# Allegro board artificiall_eye_ver00_routed.brd
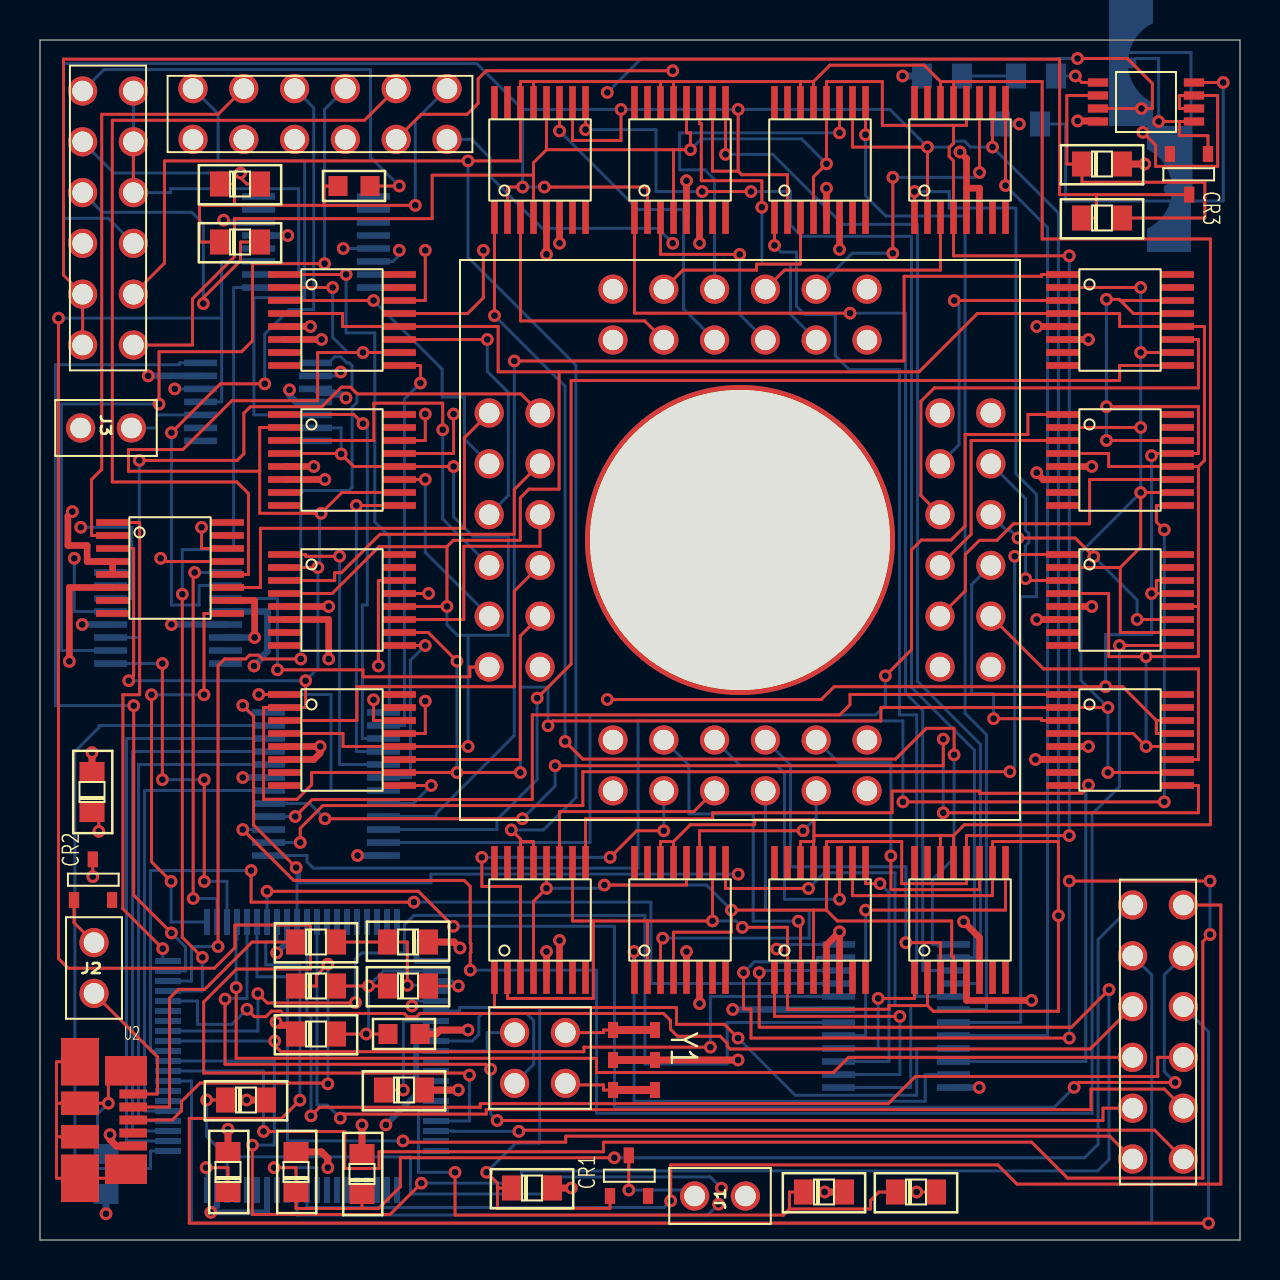
[diagram p0: board, top side]
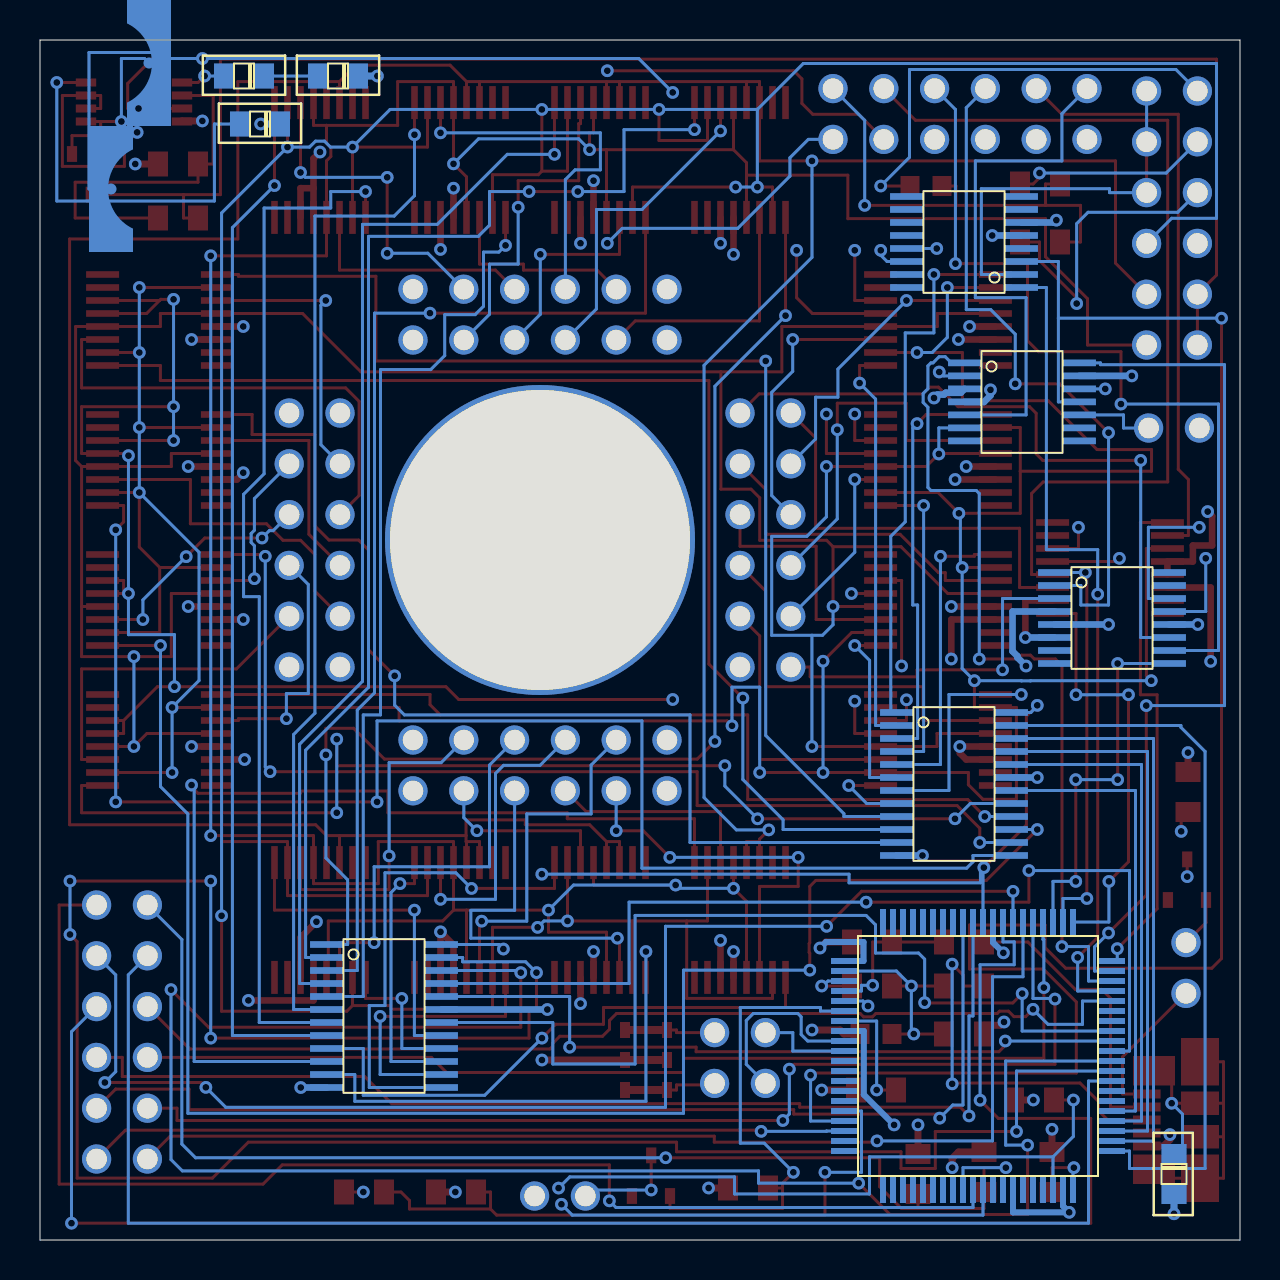
[diagram p1: board, bottom side, seen from below]

Outline 60 x 60 mm; copper layers: TOP, POWER, GROUND, BOTTOM. Coordinates in mm from the lower left corner of the outline.
Outline path: 0,60 60,60 60,0 0,0 0,60

## Design rules (mm)
constraint set DEFAULT: min track width 0.15
nets with their own width: min track width 0.35; nets GND

## Placement (name value [footprint] x y rotation side)
C1  220nF  [RC0805_SMK]  24.6 2.6 0 top
C2  4.7uF  [RC0805_SMK]  2.6 22.4 90 top
C3  10pF  [RC0805_SMK]  18.4 14.9 180 top
C4  10pF  [RC0805_SMK]  13.8 10.3 0 top
C5  470nF  [RC0805_SMK]  9.4 3.4 90 top
C6  10uF  [RC0805_SMK]  10.3 7 0 top
C7  2.2nF  [RC0805_SMK]  39.2 2.4 0 top
C8  33nF  [RC0805_SMK]  49 55.8 0 bottom
C9  150pF  [RC0805_SMK]  45.1 58.2 0 bottom
C10  220nF  [RC0805_SMK]  18.2 7.5 0 top
C11  10uF  [RC0805_SMK]  16.1 3.3 90 top
C12  100nF  [RC0805_SMK]  12.8 3.4 90 top
CR1  ZHCS500  [SOT23_LONGERPADS]  28.5 2.2 90 top
CR2  ZHCS500  [SOT23_LONGERPADS]  1.7 17 90 top
CR3  ZHCS500  [SOT23_LONGERPADS]  58.4 54.3 270 top
J1  header 1x2  [HEADER1X2]  34 2.2 90 top
J2  header 1x2  [HEADER1X2]  2.7 13.6 0 top
J3  header 1x2  [HEADER1X2]  3.3 40.6 270 top
L1  9uH  [FERRITE_BEAD]  55.5 55.7 90 bottom
R1  27  [RC0805_SMK]  13.8 14.9 0 top
R2  27  [RC0805_SMK]  13.8 12.7 0 top
R3  1M  [0603_SHN]  18.2 10.3 0 top
R4  1.4K  [RC0805_SMK]  18.4 12.7 0 top
R5  33K  [RC0805_SMK]  3.3 3.3 270 bottom
R6  47K  [RC0805_SMK]  43.8 2.4 0 top
R7  1M  [0603_SHN]  15.7 52.7 0 top
R8  10K  [RC0805_SMK]  10 52.8 0 top
R9  1.0K  [RC0805_SMK]  10 49.9 0 top
R10  38.3K  [RC0805_SMK]  53.1 51.1 0 top
R11  10K  [RC0805_SMK]  53.1 53.8 0 top
R12  34K  [RC0805_SMK]  49.8 58.2 0 bottom
U1  MSP430F5529  [MSP430F5529_LQFP80]  13.1 9.2 90 bottom
U2  micro_USB  [MICRO_USB]  2 6 0 top
U3  header_2x2  [HEADER_2X2]  25 9.1 180 top
U4  header2x6  [HEADER2X6]  14 56.3 90 top
U5  ADP1612_3  [MSOP8]  55.3 56.9 0 top
U6  header2x6  [HEADER2X6]  3.4 51.1 0 top
U7  74HC154PW  [TSSOP24]  42.8 12.5 180 bottom
U8  ADG1636  [TSSOP16]  6.5 33.6 0 top
U9  ADG1604  [TSSOP14]  10.9 41.9 180 bottom
U10  ADG1636  [TSSOP16]  13.8 49.9 0 bottom
U11  ADG1636  [TSSOP16]  6.4 31.1 180 bottom
U12  ADG1636  [TSSOP16]  25 54 90 top
U13  ADG1636  [TSSOP16]  32 54 90 top
U14  ADG1636  [TSSOP16]  39 54 90 top
U15  ADG1636  [TSSOP16]  46 54 90 top
U16  ADG1636  [TSSOP16]  15.1 46 0 top
U17  ADG1636  [TSSOP16]  54 46 0 top
U18  74HC154PW  [TSSOP24]  14.3 24.1 180 bottom
U19  ADG1636  [TSSOP16]  15.1 39 0 top
U21  ADG1636  [TSSOP16]  54 39 0 top
U22  ADG1636  [TSSOP16]  15.1 32 0 top
U23  ADG1636  [TSSOP16]  54 32 0 top
U24  ADG1636  [TSSOP16]  15.1 25 0 top
U25  ADG1636  [TSSOP16]  54 25 0 top
U26  ADG1636  [TSSOP16]  25 16 90 top
U27  ADG1636  [TSSOP16]  32 16 90 top
U28  ADG1636  [TSSOP16]  39 16 90 top
U29  ADG1636  [TSSOP16]  46 16 90 top
U30  header2x6  [HEADER2X6]  55.9 10.4 0 top
U31  Optic_nerve  [OPTICNERVE]  35 35 0 top
Y1  CST5.00MGW  [MURATA_OSC]  29.7 9 270 top

## Library data of the parts
C1 C3-C5 C7-C10 C12 = CAP NP
C2 C6 C11 = CAP
CR1-CR3 = DIODE_SCHOTTKY31
J1-J3 = header 1x2
L1 = INDUCTOR
R1-R12 = R
U1 = MSP430F5529
U2 = micro_USB
U3 = header_2x2
U4 U6 U30 = header2x6
U5 = ADP1612_3
U7 U18 = 74HC154PW
U8 U10-U17 U19 U21-U29 = ADG1636
U9 = ADG1604
U31 = Optic_nerve
Y1 = OSC6_SM

## Footprints (pads in the part's own frame, mm; a bottom-side part is the same pattern mirrored in y, then rotated)
0603_SHN
  rect 0.95x1 smd: 1(-0.8,0) 2(0.8,0)
FERRITE_BEAD
  custom 6.3x2.2 smd: 1(-3.15,0.95) 2(3.15,-0.95)
HEADER1X2
  round 1.46 hole 1.029: 1(0,1.27) 2(0,-1.27)
HEADER2X6
  round 1.46 hole 1.029: 1(-1.27,6.35) 2(-1.27,3.81) 3(-1.27,1.27) 4(-1.27,-1.27) 5(-1.27,-3.81) 6(-1.27,-6.35) 7(1.27,6.35) 8(1.27,3.81) 9(1.27,1.27) 10(1.27,-1.27) 11(1.27,-3.81) 12(1.27,-6.35)
HEADER_2X2
  round 1.46 hole 1.029: 1(-1.27,1.27) 2(-1.27,-1.27) 3(1.27,1.27) 4(1.27,-1.27)
MICRO_USB
  rect 1.38x0.45 smd: 1(2.66,1.3) 2(2.66,0.65) 3(2.66,0) 4(2.66,-0.65) 5(2.66,-1.3)
  rect 2.1x1.475 smd: 6(2.3,2.462) 7(2.3,-2.462)
  rect 1.9x2.375 smd: 8(0,2.913) 9(0,-2.913)
  rect 1.9x1.175 smd: 10(0,0.838) 11(0,-0.838)
MSOP8
  rect 1.016x0.406 smd: 1(-2.4,0.975) 2(-2.4,0.325) 3(-2.4,-0.325) 4(-2.4,-0.975) 5(2.4,-0.975) 6(2.4,-0.325) 7(2.4,0.325) 8(2.4,0.975)
MSP430F5529_LQFP80
  rect 1.3x0.3 smd: 1(-6.7,4.75) 2(-6.7,4.25) 3(-6.7,3.75) 4(-6.7,3.25) 5(-6.7,2.75) 6(-6.7,2.25) 7(-6.7,1.75) 8(-6.7,1.25) 9(-6.7,0.75) 10(-6.7,0.25) 11(-6.7,-0.25) 12(-6.7,-0.75) 13(-6.7,-1.25) 14(-6.7,-1.75) 15(-6.7,-2.25) 16(-6.7,-2.75) 17(-6.7,-3.25) 18(-6.7,-3.75) 19(-6.7,-4.25) 20(-6.7,-4.75) 41(6.7,-4.75) 42(6.7,-4.25) 43(6.7,-3.75) 44(6.7,-3.25) 45(6.7,-2.75) 46(6.7,-2.25) 47(6.7,-1.75) 48(6.7,-1.25) 49(6.7,-0.75) 50(6.7,-0.25) 51(6.7,0.25) 52(6.7,0.75) 53(6.7,1.25) 54(6.7,1.75) 55(6.7,2.25) 56(6.7,2.75) 57(6.7,3.25) 58(6.7,3.75) 59(6.7,4.25) 60(6.7,4.75)
  rect 0.3x1.3 smd: 21(-4.75,-6.7) 22(-4.25,-6.7) 23(-3.75,-6.7) 24(-3.25,-6.7) 25(-2.75,-6.7) 26(-2.25,-6.7) 27(-1.75,-6.7) 28(-1.25,-6.7) 29(-0.75,-6.7) 30(-0.25,-6.7) 31(0.25,-6.7) 32(0.75,-6.7) 33(1.25,-6.7) 34(1.75,-6.7) 35(2.25,-6.7) 36(2.75,-6.7) 37(3.25,-6.7) 38(3.75,-6.7) 39(4.25,-6.7) 40(4.75,-6.7) 61(4.75,6.7) 62(4.25,6.7) 63(3.75,6.7) 64(3.25,6.7) 65(2.75,6.7) 66(2.25,6.7) 67(1.75,6.7) 68(1.25,6.7) 69(0.75,6.7) 70(0.25,6.7) 71(-0.25,6.7) 72(-0.75,6.7) 73(-1.25,6.7) 74(-1.75,6.7) 75(-2.25,6.7) 76(-2.75,6.7) 77(-3.25,6.7) 78(-3.75,6.7) 79(-4.25,6.7) 80(-4.75,6.7)
MURATA_OSC
  custom 0.8x2.6 smd: 1(-1.5,0) 2(0,0) 3(1.5,0)
OPTICNERVE
  round 15.5 hole 15 unplated: (0,0)
  round 1.46 hole 1.02: 1(-12.54,6.35) 2(-12.54,3.81) 3(-12.54,1.27) 4(-12.54,-1.27) 5(-12.54,-3.81) 6(-12.54,-6.35) 7(-10,6.35) 8(-10,3.81) 9(-10,1.27) 10(-10,-1.27) 11(-10,-3.81) 12(-10,-6.35) 13(-6.35,-12.54) 14(-3.81,-12.54) 15(-1.27,-12.54) 16(1.27,-12.54) 17(3.81,-12.54) 18(6.35,-12.54) 19(-6.35,-10) 20(-3.81,-10) 21(-1.27,-10) 22(1.27,-10) 23(3.81,-10) 24(6.35,-10) 25(12.54,-6.35) 26(12.54,-3.81) 27(12.54,-1.27) 28(12.54,1.27) 29(12.54,3.81) 30(12.54,6.35) 31(10,-6.35) 32(10,-3.81) 33(10,-1.27) 34(10,1.27) 35(10,3.81) 36(10,6.35) 37(6.35,12.54) 38(3.81,12.54) 39(1.27,12.54) 40(-1.27,12.54) 41(-3.81,12.54) 42(-6.35,12.54) 43(6.35,10) 44(3.81,10) 45(1.27,10) 46(-1.27,10) 47(-3.81,10) 48(-6.35,10)
RC0805_SMK
  rect 1.001x1.25 smd: 1(-1.001,0) 2(1.001,0)
SOT23_LONGERPADS
  rect 0.79x0.513 smd: 1(0,0) 2(0,-1.905) 3(2.032,-0.94)
TSSOP14
  rect 1.651x0.33 smd: 1(-2.87,1.956) 2(-2.87,1.306) 3(-2.87,0.655) 4(-2.87,0.005) 5(-2.87,-0.645) 6(-2.87,-1.295) 7(-2.87,-1.946) 8(2.87,-1.946) 9(2.87,-1.295) 10(2.87,-0.645) 11(2.87,0.005) 12(2.87,0.655) 13(2.87,1.306) 14(2.87,1.956)
TSSOP16
  rect 1.651x0.33 smd: 1(-2.87,2.276) 2(-2.87,1.626) 3(-2.87,0.975) 4(-2.87,0.325) 5(-2.87,-0.325) 6(-2.87,-0.975) 7(-2.87,-1.626) 8(-2.87,-2.276) 9(2.87,-2.276) 10(2.87,-1.626) 11(2.87,-0.975) 12(2.87,-0.325) 13(2.87,0.325) 14(2.87,0.975) 15(2.87,1.626) 16(2.87,2.276)
TSSOP24
  rect 1.651x0.33 smd: 1(-2.87,2.276) 2(-2.87,1.626) 3(-2.87,0.975) 4(-2.87,0.325) 5(-2.87,-0.325) 6(-2.87,-0.975) 7(-2.87,-1.626) 8(-2.87,-2.276) 9(-2.87,-2.926) 10(-2.87,-3.576) 11(-2.87,-4.226) 12(-2.87,-4.876) 13(2.87,-4.876) 14(2.87,-4.226) 15(2.87,-3.576) 16(2.87,-2.926) 17(2.87,-2.276) 18(2.87,-1.626) 19(2.87,-0.975) 20(2.87,-0.325) 21(2.87,0.325) 22(2.87,0.975) 23(2.87,1.626) 24(2.87,2.276)

## Nets
5V_OR_EXT_0: U4.7 U9.5
5V_OR_EXT_1: U4.8 U8.2
5V_OR_EXT_3: U4.9(P9) U11.2
5V_OR_EXT_4: U4.10 U11.10
6V_REG_OUT: CR3.3 R10.1 U6.5 U6.6
GND: C1.2 C2.2 C3.1 C4.1 C5.2 C6.2 C7.2 C8.1 C9.1 C10.2 C11.2 C12.2 R3.2 R5.2 R11.2 U1.14 U1.19 U1.49 U1.61 U1.68 U2.5 U5.4 U6.4 U7.12 U7.19 U8.4 U8.5(VSS) U8.6 U8.10 U9.3(VSS) U9.4 U9.13 U10.5(VSS) U10.6 U11.4 U11.5(VSS) U11.6 U11.12 U12.5(VSS) U12.6 U13.5(VSS) U13.6 U14.5(VSS) U14.6 U15.5(VSS) U15.6 U16.5(VSS) U16.6 U17.5(VSS) U17.6 U18.12 U18.19 U19.5(VSS) U19.6 U21.5(VSS) U21.6 U22.5(VSS) U22.6 U23.5(VSS) U23.6 U24.5(VSS) U24.6 U25.5(VSS) U25.6 U26.5(VSS) U26.6 U27.5(VSS) U27.6 U28.5(VSS) U28.6 U29.5(VSS) U29.6 Y1.2
VCC3_3V: C6.1 J1.2 R6.2 U1.11 U1.18 U1.50 U4.5 U4.6 U7.24(VCC) U18.24(VCC)
VCC3_3V_OR_EXT_2: U4.11 U8.12
VCC5V: C2.1 CR2.3 L1.1 U1.65 U4.1 U4.2 U4.3 U4.4 U5.3 U5.6(VIN) U5.7 U8.13 U8.14 U9.2 U9.12 U10.13 U10.14 U11.13 U11.14 U16.13 U16.14 U17.13 U17.14 U19.13 U19.14 U21.13 U21.14 U22.13 U22.14 U23.13 U23.14 U24.13 U24.14 U25.13 U25.14
ADC_MEAS_R: U6.7 U6.8 U6.9(P9) U10.2
ADC_MSP430: U1.77 U9.11 U10.3
ADC_RES_CTRL: U1.37 U10.1
ARRAY_MRG: U11.11 U31.7
ARRAY_MRG_CTRL: U1.43 U11.9
ARRAY_RST: U11.3 U31.6
ARRAY_RST_CTRL: U1.42 U11.1
ARRAY_VDD: U8.11 U31.1
ARRAY_VDD_CTRL: U1.41 U8.9
COL_0: U12.3 U31.47
COL_1: U12.11 U31.46
COL_2: U13.3 U31.45
COL_3: U13.11 U31.44
COL_4: U14.3 U31.41
COL_5: U14.11 U31.40
COL_6: U15.3 U31.39
COL_7: U15.11 U31.38
COL_8: U26.3 U31.14
COL_9: U26.11 U31.15
COL_10: U27.3 U31.16
COL_11: U27.11 U31.17
COL_12: U28.3 U31.20
COL_13: U28.11 U31.21
COL_14: U29.3 U31.22
COL_15: U29.11 U31.23
COL_ADD_0: U1.29 U7.23
COL_ADD_1: U1.30 U7.22
COL_ADD_2: U1.31 U7.21
COL_ADD_3: U1.32 U7.20
COL_DEC_0: U7.1 U12.1
COL_DEC_1: U7.2 U12.9
COL_DEC_2: U7.3 U13.1
COL_DEC_3: U7.4 U13.9
COL_DEC_4: U7.5 U14.1
COL_DEC_5: U7.6 U14.9
COL_DEC_6: U7.7 U15.1
COL_DEC_7: U7.8 U15.9
COL_DEC_8: U7.9 U26.1
COL_DEC_9: U7.10 U26.9
COL_DEC_10: U7.11 U27.1
COL_DEC_11: U7.13 U27.9
COL_DEC_12: U7.14 U28.1
COL_DEC_13: U7.15 U28.9
COL_DEC_14: U7.16 U29.1
COL_DEC_15: U7.17 U29.9
COL_DEC_EN_N: U1.33 U7.18
COL_IN_SEL: U6.12 U12.4 U12.12 U13.4 U13.12 U14.4 U14.12 U15.4 U15.12 U26.4 U26.12 U27.4 U27.12 U28.4 U28.12 U29.4 U29.12
COL_IN_UNSEL: U6.10 U12.2 U12.10 U13.2 U13.10 U14.2 U14.10 U15.2 U15.10 U26.2 U26.10 U27.2 U27.10 U28.2 U28.10 U29.2 U29.10
COL_SW_VDD: U6.11 U12.13 U12.14 U13.13 U13.14 U14.13 U14.14 U15.13 U15.14 U26.13 U26.14 U27.13 U27.14 U28.13 U28.14 U29.13 U29.14
HEADER_OUT1: U1.28 U30.2
HEADER_OUT2: U1.36 U30.3
HEADER_OUT3: U1.44 U30.4
HEADER_OUT4: U1.45 U30.5
HEADER_OUT5: U1.46 U30.6
HEADER_OUT6: U1.47 U30.8
HEADER_OUT7: U1.48 U30.9(P9)
HEADER_OUT8: U1.51 U30.10
HEADER_OUT9: U1.52 U30.11
HEADER_OUT10: U1.78 U30.12
MEAS_EXT: J3.1 U9.10
ROW_0: U16.3 U31.2
ROW_1: U16.11 U31.3
ROW_2: U19.3 U31.4
ROW_3: U19.11 U31.5
ROW_4: U22.3 U31.8
ROW_5: U22.11 U31.9
ROW_6: U24.3 U31.10
ROW_7: U24.11 U31.11
ROW_8: U17.3 U31.35
ROW_9: U17.11 U31.34
ROW_10: U21.3 U31.33
ROW_11: U21.11 U31.32
ROW_12: U23.3 U31.29
ROW_13: U23.11 U31.28
ROW_14: U25.3 U31.27
ROW_15: U25.11 U31.26
ROW_ADD_0: U1.21 U18.23
ROW_ADD_1: U1.22 U18.22
ROW_ADD_2: U1.23 U18.21
ROW_ADD_3: U1.24 U18.20
ROW_DEC_0: U16.1 U18.1
ROW_DEC_1: U16.9 U18.2
ROW_DEC_2: U18.3 U19.1
ROW_DEC_3: U18.4 U19.9
ROW_DEC_4: U18.5 U22.1
ROW_DEC_5: U18.6 U22.9
ROW_DEC_6: U18.7 U24.1
ROW_DEC_7: U18.8 U24.9
ROW_DEC_8: U17.1 U18.9
ROW_DEC_9: U17.9 U18.10
ROW_DEC_10: U18.11 U21.1
ROW_DEC_11: U18.13 U21.9
ROW_DEC_12: U18.14 U23.1
ROW_DEC_13: U18.15 U23.9
ROW_DEC_14: U18.16 U25.1
ROW_DEC_15: U18.17 U25.9
ROW_DEC_EN_N: U1.25 U18.18
ROW_IN_SEL: U9.6 U16.4 U16.12 U17.4 U17.12 U19.4 U19.12 U21.4 U21.12 U22.4 U22.12 U23.4 U23.12 U24.4 U24.12 U25.4 U25.12
ROW_IN_SEL_CTRL0: U1.38 U9.1
ROW_IN_SEL_CTRL1: U1.39 U9.14
ROW_IN_UNSEL: U8.3 U16.2 U16.10 U17.2 U17.10 U19.2 U19.10 U21.2 U21.10 U22.2 U22.10 U23.2 U23.10 U24.2 U24.10 U25.2 U25.10
ROW_IN_UNSEL_CTRL: U1.40 U8.1
VREFM: U1.10 U30.7
VREFP: C11.1 C12.1 U1.9 U30.1
N13187266: R7.1 R8.1 R9.1 U4.12
N13196250: CR3.1 L1.2 U5.5
N13196262: R10.2 R11.1 U5.2
N13196294: R12.2 U5.1
N13196302: C9.2 R12.1
N13196326: C8.2 U5.8
N13248787: R5.1 U2.6 U2.7 U2.8 U2.9 U2.10 U2.11
N13249241: R2.1 U2.3
N13249245: R1.1 U2.2
N13261184: C4.2 R2.2 R3.1 R4.1 U1.62
N13262575: C3.2 R1.2 U1.64
N13281571: C1.1 CR1.1 U1.66(VUSB)
N13289262: C7.1 R6.1 U1.76
N13290467: C5.1 U1.20
N13297750: U3.1 Y1.3
N13297765: U3.2 Y1.1
N13310346: C10.1 U1.67
N131865130: R7.2 U6.1
N131865131: R8.2 U6.2
N131865132: R9.2 U6.3
N132488690: J2.2 U2.1(VBUS)
N132492920: CR2.1 J2.1
N132698311: CR1.3 J1.1
N1324771962: R4.2 U1.63
N1324771968: U1.69 U3.3
N1324771969: U1.70 U3.4(P4)

Pads without a net: CR1 2; CR2 2; CR3 2; J3 2; U1 1 2 3 4 5 6 7 8 12 13 15 16 17 26 27 34 35 53 54 55 56 57 58 59 60 71 72 73 74 75 79 80; U2 4; U8 7 8 15 16; U9 7 8 9; U10 4 7 8 9 10 11 12 15 16; U11 7 8 15 16; U12 7 8 15 16; U13 7 8 15 16; U14 7 8 15 16; U15 7 8 15 16; U16 7 8 15 16; U17 7 8 15 16; U19 7 8 15 16; U21 7 8 15 16; U22 7 8 15 16; U23 7 8 15 16; U24 7 8 15 16; U25 7 8 15 16; U26 7 8 15 16; U27 7 8 15 16; U28 7 8 15 16; U29 7 8 15 16; U31 12 13 18 19 24 25 30 31 36 37 42 43 48

## Via types
v1: diameter 0.635, hole 0.343, TOP to BOTTOM, 294 vias

## Routing (per net, layer and track width the routed paths; a pad name or vN(x,y) marks a point on that pad's centre or on a via; arc(x,y) is an arc through that point)
5V_OR_EXT_0: length 26.8
  BOTTOM w0.15: U9.5 10.69,41.25 10.69,47.12 13.23,47.12 13.23,53.95 8.91,53.95 8.91,56.31 U4.7
5V_OR_EXT_1: length 30
  TOP w0.15: U8.2 2.58,35.23 2.58,38.03 3.09,38.53 3.09,56.29 8.91,56.29 U4.8
5V_OR_EXT_3: length 34.9
  TOP w0.15: v1(11.24,42.81) 9.02,42.81 v1(6.57,40.36)
  BOTTOM w0.15: v1(11.24,42.81) 11.24,45.29 12.46,46.52 13.69,46.52 13.69,56.61 U4.9 ; v1(6.57,40.36) 6.57,31.75 7.96,31.75 7.96,32.73 U11.2
5V_OR_EXT_4: length 43.8
  TOP w0.15: v1(14.23,48.82) 10.62,48.82 10.62,44.96 10.07,44.41 5.95,44.41 v1(5.95,41.8)
  BOTTOM w0.15: v1(5.95,41.8) 1.07,41.8 1.07,29.47 U11.10 ; U4.10 14.23,56.53 v1(14.23,48.82)
6V_REG_OUT: length 79.6
  TOP w0.15: 52.82,52.27 50.98,52.27 50.98,59.04 1.17,59.04 1.17,48.25 U6.5 U6.6 ; 52.82,52.27 CR3.3 ; 52.82,52.27 52.82,51.1 R10.1
GND: length 153.6
  TOP w0.33: v1(32.98,49.84) U13.6 ; v1(52.42,24.67) U25.5 ; v1(52.42,45.02) U17.6 ; v1(46.18,15.91) 46.98,15.12 U29.6 ; v1(1.62,36.42) 1.39,36.2 1.39,34.73 2.36,34.73 2.36,33.93 U8.4 U8.5 ; v1(1.47,28.93) 1.47,32.62 U8.6 ; v1(14.25,38.02) U19.6 ; v1(14.43,31.67) U22.5 ; v1(14.43,29.05) 14.43,31.02 U22.6 ; v1(49.77,24.02) U25.6 ; v1(32.33,14.42) U27.5 ; 46.33,52.59 46.33,54.07 v1(46,54.4) ; 46.33,52.59 U15.5 ; 46.33,52.59 46.98,52.59 U15.6 ; U17.5 49.84,45.67 v1(49.84,45.67) ; v1(39.33,52.59) U14.5 ; U24.6 13.69,24.02 14.01,24.34 v1(14.01,24.67) U24.5 ; v1(25.98,49.84) U12.6 ; v1(49.58,11.98) 46.33,11.98 U29.5 ; v1(13.69,38.67) U19.5 ; v1(32.98,11.82) U27.6 ; v1(10.73,30.12) 10.73,31.97 U8.10 ; v1(13.52,45.67) U16.5 ; v1(14.08,45.02) U16.6 ; v1(52.59,31.67) U23.5 ; v1(25.33,49.28) U12.5 ; v1(39.98,49.53) U14.6 ; U28.5 39.33,14.76 v1(39.98,15.41) U28.6 ; v1(25.33,14.42) U26.5 ; v1(49.84,31.02) U23.6 ; v1(52.59,38.67) U21.5 ; v1(32.33,52.97) U13.5 ; v1(49.84,38.36) 49.84,38.34 50.15,38.02 U21.6 ; v1(25.98,14.98) U26.6
  TOP w0.35: v1(21.4,10.5) 20,10.5 19.8,10.3 R3.2 ; v1(26.57,2.6) C1.2 ; v1(34.9,9) Y1.2 ; C3.1 20.7,14.9 v1(21,14.6) ; v1(3.5,5.27) 3.5,5.02 3.82,4.7 U2.5 ; v1(14.39,3.62) 14.39,4.08 14.07,4.4 C12.2 ; C4.1 12.8,10.73 11.96,10.73 v1(11.8,10.9) ; v1(20.92,7.5) C10.2 ; v1(10.33,7) C6.2 ; v1(16.1,5.75) C11.2 ; v1(55.24,53.8) R11.2 ; v1(9.4,5.54) C5.2 ; v1(39.23,2.4) C7.2 ; v1(2.6,24.37) C2.2 ; v1(51.88,55.95) 52.9,55.95 U5.4
  GROUND w0.5: 2.13,48.92 U6.4 ; U6.4 3.04,49.83 ; U6.4 2.13,50.74 ; U6.4 1.22,49.83
  BOTTOM w0.3: U1.68 18.81,10.45 18.81,7.27 v1(17.29,5.75) ; U1.19 8.85,1.7 8.54,1.39 v1(8.54,1.38) 11.35,1.38 U1.14 ; v1(11.83,14.36) 12.35,14.88 U1.49 ; U1.61 18.82,13.95 18.82,14.9 20.7,14.9 v1(21,14.6)
  BOTTOM w0.33: v1(34.63,11.52) U7.19 ; U10.6 9.3,50.88 v1(9.18,50.99) ; v1(15.88,19.22) U18.12 ; U9.3 13.96,42.36 14.72,42.36 14.81,42.27 15.13,42.27 v1(15.3,42.1) ; v1(2.11,30.77) U11.12 ; v1(46.96,7.62) U7.12 ; v1(10.14,23.12) U18.19 ; v1(10.7,28.7) 11.13,29.13 11.13,29.19 11.37,29.44 11.37,31.43 U11.4 ; v1(6.57,30.77) U11.5 ; U9.4 12.79,41.91 12.48,42.22 v1(12.48,42.51) ; v1(5.41,43.21) U9.13 ; v1(10.73,30.12) U11.6 ; v1(12.39,50.23) U10.5
  BOTTOM w0.35: v1(48.97,55.8) C8.1 ; v1(43.13,58.2) C9.1 ; v1(3.3,1.31) R5.2
VCC3_3V: length 130.4
  TOP w0.15: v1(12.81,18.62) 10.68,20.75 10.68,26.19 v1(10.14,26.73) ; v1(8.33,7) C6.1 ; v1(43.83,2.4) R6.2 ; v1(31.64,58.46) 22.31,58.46 21.91,58.05 21.91,56.83 21.36,56.29 19.07,56.29 U4.5
  POWER w0.5: J1.2 36.18,2.2 ; J1.2 34.36,2.2 ; J1.2 35.27,3.11 ; J1.2 35.27,1.29
  BOTTOM w0.15: U18.24 10.45,26.38 10.14,26.69 v1(10.14,26.73) ; v1(33.93,1.79) 33.39,1.24 12.85,1.24 U1.11 ; U7.24 37.06,14.78 v1(36.83,14.55) ; 9.35,4.16 18.52,4.16 18.52,2.3 25.27,2.3 25.27,3.16 33.51,3.16 v1(34.07,2.6) ; 9.35,4.16 8.33,5.18 v1(8.33,7) ; 9.35,4.16 U1.18 ; U4.6 21.58,55.03 22.51,54.11 22.51,53.19 25.11,50.58 30.89,50.58 v1(31.64,49.84) ; v1(12.81,18.62) 12.85,18.58 ; 12.85,18.58 U1.50 ; 12.85,18.58 12.98,18.45 12.98,17.86 19.55,17.86 19.55,18.29 v1(34.91,18.29)
VCC3_3V_OR_EXT_2: length 45.1
  TOP w0.15: U8.12 10.42,33.27 10.42,37.32 9.84,37.9 3.61,37.9 3.61,55.99 16.23,55.99 U4.11
VCC5V: length 204.3
  TOP w0.15: U5.3 v1(55.07,56.57) 55.62,56.57 55.62,57.82 54.37,59.08 v1(51.88,59.08) ; U16.13 21.38,46.33 22.17,47.11 v1(22.17,49.48) ; v1(55.58,39.22) 55.68,39.33 U21.13 57.92,39.33 57.92,41.67 v1(53.32,41.67) ; U16.14 19.26,46.98 v1(19.26,49.48) ; v1(53.32,47.03) 53.96,47.03 54.02,46.98 ; U19.13 20.68,39.33 v1(20.68,41.3) ; U8.14 8.08,34.58 v1(8.08,35.63) ; U23.14 55.82,32.98 55.82,32.33 ; 55.82,25.98 U25.14 ; 55.82,25.98 54.13,27.67 v1(53.28,27.67) 39.7,27.67 39.06,27.02 v1(28.36,27.02) ; 55.82,25.98 55.82,25.33 U25.13 ; 54.02,46.98 U17.14 ; 54.02,46.98 54.67,46.33 U17.13 ; v1(19.26,26.94) 19.26,25.33 U24.13 ; v1(16.68,27.01) 16.68,25.98 U24.14 ; U23.13 55.82,32.33 ; 55.82,32.33 v1(55.58,32.33) ; v1(16.92,28.7) 16.92,32.98 U22.14 ; v1(55.14,55.38) 55.78,54.75 55.78,53.68 58.88,53.68 58.88,57.23 U5.7 56.97,57.23 56.97,56.57 U5.6 ; C2.1 2.94,21.4 v1(2.94,20.43) ; v1(6.03,34.08) 6.19,33.93 U8.13 ; U19.14 19.26,39.98 v1(19.26,41.3) ; v1(53.32,39.98) U21.14 ; v1(19.43,32.33) U22.13 ; v1(2.64,18.17) CR2.3
  POWER w0.5: 12.73,54.12 U4.3 ; U4.3 13.64,55.03 ; U4.3 11.82,55.03 ; U4.3 12.73,55.94 ; U4.4 15.27,55.94 ; U4.4 16.18,55.03 ; U4.4 15.27,54.12 ; U4.4 14.36,55.03 ; U4.1 7.65,55.94 ; U4.1 6.74,55.03 ; U4.1 7.65,54.12 ; U4.1 8.56,55.03 ; U4.2 10.19,55.94 ; U4.2 11.1,55.03 ; U4.2 9.28,55.03
  BOTTOM w0.15: v1(6.74,42.56) U9.12 ; v1(53.32,39.98) v1(53.32,41.67) v1(53.32,47.03) ; U10.14 17.65,48.92 17.96,49.24 v1(17.96,49.48) ; v1(2.04,35.63) 4.58,35.63 4.58,32.08 U11.14 ; v1(55.07,56.57) 55.07,55.92 55.14,55.92 v1(55.14,55.38) ; v1(15.04,43.4) 15,43.4 14.81,43.21 U9.2 ; U1.65 18.85,11.95 v1(18.6,11.7) ; v1(28.36,57.38) 30.06,59.08 v1(51.88,59.08) 54.1,59.08 54.4,59.38 57.55,59.38 57.55,52.55 L1.1 ; v1(53.28,27.67) 53.28,30.27 55.58,30.27 v1(55.58,32.33) v1(55.58,39.22) ; U11.13 1.71,31.43 v1(1.71,34.08) ; v1(15.16,49.57) U10.13
ADC_MEAS_R: length 19.8
  TOP w0.15: U6.9 U6.8
  BOTTOM w0.15: U6.9 6.53,52.37 6.53,52.57 12.93,52.57 12.93,48.27 U10.2 ; U6.7 U6.8
ADC_MSP430: length 93.5
  TOP w0.15: v1(21.47,8.24) 21.37,8.35 8.18,8.35 8.18,11.9 9.83,13.55 13.52,13.55 13.52,15.75 9.74,15.75 9.74,14.62 8.71,13.59 1.41,13.59 0.92,14.07 v1(0.92,46.09)
  BOTTOM w0.15: U10.3 9.08,48.92 9.08,46.09 ; v1(0.92,46.09) 9.08,46.09 ; 9.08,46.09 9.08,41.91 U9.11 ; v1(21.47,8.24) 21.47,5.95 U1.77
ADC_RES_CTRL: length 41.1
  TOP w0.15: v1(7.12,32.29) 7.12,15.13 v1(8.12,14.13)
  BOTTOM w0.15: v1(7.12,32.29) 7.12,34.52 9.68,34.52 9.68,47.62 U10.1 ; v1(8.12,14.13) 8.12,12.45 U1.37
ARRAY_MRG: length 33.6
  TOP w0.15: v1(4.97,38.98) 9.86,38.98 10.19,39.31 10.19,41.34 10.52,41.67 14.1,41.67 15.08,42.64 15.52,42.64 15.86,42.3 24.05,42.3 U31.7
  BOTTOM w0.15: v1(4.97,38.98) 4.97,30.12 U11.11
ARRAY_MRG_CTRL: length 18.7
  TOP w0.15: v1(8.21,23.02) v1(8.21,17.93) ; v1(6.12,28.82) v1(6.12,23.02)
  BOTTOM w0.15: v1(6.12,23.02) v1(8.21,23.02) ; v1(8.21,17.93) 9.35,17.93 U1.43 ; U11.9 v1(6.12,28.82)
ARRAY_RST: length 17.6
  TOP w0.15: v1(11.87,28.51) 16.15,28.51 16.15,28.16 21.49,28.16 21.49,28.65 U31.6
  BOTTOM w0.15: U11.3 11.87,32.08 v1(11.87,28.51)
ARRAY_RST_CTRL: length 20.2
  TOP w0.15: v1(7.66,17.07) 7.66,33.3 v1(7.73,33.38)
  BOTTOM w0.15: v1(7.66,17.07) 8.85,17.07 U1.42 ; U11.1 v1(7.73,33.38)
ARRAY_VDD: length 21.1
  TOP w0.15: U31.1 21.22,40.11 21.22,35.59 11.02,35.59 11.02,32.62 U8.11
ARRAY_VDD_CTRL: length 21.4
  TOP w0.15: U8.9 8.2,31.32 v1(8.2,27.26) ; v1(5.58,27.26) 5.58,18.91 v1(6.55,17.93)
  BOTTOM w0.15: U1.41 6.55,15.9 v1(6.55,17.93) ; v1(8.2,27.26) v1(5.58,27.26)
COL_0: length 12.7
  TOP w0.15: U12.3 24.02,45.95 30.23,45.95 U31.47
COL_1: length 16.4
  TOP w0.15: U12.11 v1(25.98,55.45)
  BOTTOM w0.15: v1(25.98,55.45) 29.9,51.53 32.18,51.53 32.18,46.55 U31.46
COL_2: length 10.6
  TOP w0.15: U13.3 31.02,49.28 v1(34.98,49.28)
  BOTTOM w0.15: v1(34.98,49.28) 34.98,46.28 U31.45
COL_3: length 17
  TOP w0.15: U13.11 32.98,55.82 33.07,55.82 33.07,52.97 36.09,52.97 v1(36.09,51.64)
  BOTTOM w0.15: U31.44 37.52,46.28 37.52,48.8 36.09,48.8 v1(36.09,51.64)
COL_4: length 9.9
  TOP w0.15: U14.3 38.02,48.8 35.83,48.8 35.83,48.49 32.15,48.49 U31.41
COL_5: length 18.8
  TOP w0.15: U14.11 v1(39.98,55.36)
  BOTTOM w0.15: U31.40 33.73,53.02 33.24,53.51 31.98,53.51 31.98,55.36 v1(39.98,55.36)
COL_6: length 11.8
  TOP w0.15: U31.39 37.23,48.49 45.02,48.49 U15.3
COL_7: length 16.3
  TOP w0.15: U15.11 v1(46.98,53.38) ; v1(42.64,53.13) v1(42.64,49.34)
  BOTTOM w0.15: v1(42.64,53.13) 46.73,53.13 v1(46.98,53.38) ; v1(42.64,49.34) 40.61,49.34 U31.38
COL_8: length 19.6
  TOP w0.15: U26.3 24.02,17.68 22.09,17.68 v1(22.09,19.13) ; v1(31.19,20.46) 29.84,20.46 v1(28.51,19.13)
  BOTTOM w0.15: U31.14 v1(31.19,20.46) ; v1(22.09,19.13) v1(28.51,19.13)
COL_9: length 10.7
  TOP w0.15: U31.15 32.69,21.42 25.98,21.42 U26.11
COL_10: length 18.9
  TOP w0.15: v1(31.13,15.09) 31.02,14.98 U27.3
  BOTTOM w0.15: v1(31.13,15.09) 38.46,15.09 38.46,16.48 36.27,16.48 U31.16
COL_11: length 9
  TOP w0.15: v1(38.16,20.46) 32.98,20.46 U27.11
  BOTTOM w0.15: U31.17 38.81,21.12 v1(38.16,20.46)
COL_12: length 17.9
  TOP w0.15: v1(37.92,15.94) 38.02,15.83 U28.3
  BOTTOM w0.15: U31.20 32.45,23.75 32.45,21.31 35.66,21.31 35.66,15.94 v1(37.92,15.94)
COL_13: length 15.1
  TOP w0.15: U28.11 v1(39.98,17.03)
  BOTTOM w0.15: v1(39.98,17.03) 37.23,17.03 37.23,23.33 36.82,23.73 35,23.73 U31.21
COL_14: length 19.9
  TOP w0.15: v1(43.29,14.87) 45.02,14.87 U29.3
  BOTTOM w0.15: U31.22 37.52,23.75 37.52,18.66 43.29,18.66 v1(43.29,14.87)
COL_15: length 16.3
  TOP w0.15: v1(42.54,19.2) 42.54,17.52 46.98,17.52 U29.11
  BOTTOM w0.15: U31.23 39.94,23.87 42.54,23.87 v1(42.54,19.2)
COL_ADD_0: length 113.3
  TOP w0.15: v1(51.46,10.1) 35.55,10.1 35.55,11.55 35.18,11.55 v1(35.18,13.37) ; v1(11.18,5.43) 15.23,5.43 15.23,3.58 16.95,3.58 16.95,4.41 28.17,4.41 28.17,4.89 49.58,4.89 51.38,3.09 58.14,3.09 58.14,14.92 v1(58.5,15.28) ; v1(51.46,17.95) v1(58.5,17.95)
  BOTTOM w0.15: v1(58.5,17.95) v1(58.5,15.28) ; v1(11.18,5.43) 11.18,8.45 U1.29 ; v1(35.18,13.37) 35.72,13.91 38.87,13.91 38.87,14.13 U7.23 ; v1(51.46,10.1) v1(51.46,17.95)
COL_ADD_1: length 91.9
  TOP w0.15: v1(10.62,4.74) 10.62,1.27 17.5,1.27 v1(19.07,2.84) ; v1(35.96,13.37) 35.96,10.64 51.57,10.64 v1(53.45,12.52)
  BOTTOM w0.15: v1(35.96,13.37) 36.07,13.48 U7.22 ; v1(19.07,2.84) 24.07,2.84 24.07,3.46 52.88,3.46 53.45,4.02 v1(53.45,12.52) ; v1(10.62,4.74) 11.72,4.74 11.72,8.95 U1.30
COL_ADD_2: length 49.9
  TOP w0.15: v1(18.69,16.89) 10.56,16.89 v1(10.56,18.47)
  BOTTOM w0.15: v1(18.69,16.89) 30.55,16.89 30.55,12.83 U7.21 ; v1(10.56,18.47) 5.53,18.47 5.53,9.45 U1.31
COL_ADD_3: length 36.6
  TOP w0.15: v1(33.52,9.64) 27.19,9.64 27.19,9.41 12.05,9.41 11.74,9.73 v1(11.74,9.95)
  BOTTOM w0.15: U7.20 33.52,12.17 v1(33.52,9.64) ; U1.32 v1(11.74,9.95)
COL_DEC_0: length 60.4
  TOP w0.15: U12.1 v1(22.72,46.22) ; v1(45.7,24.26) 45.7,25.59 44.32,25.59 42.78,24.05 27.14,24.05 v1(26.25,24.93)
  BOTTOM w0.15: v1(26.25,24.93) 26.25,42.69 v1(22.72,46.22) ; v1(45.7,24.26) 45.7,19.1 44.62,18.01 44.62,14.78 U7.1
COL_DEC_1: length 61.1
  TOP w0.15: v1(33.11,52.42) v1(35.55,52.42) ; U12.9 v1(27.28,55.52)
  BOTTOM w0.15: v1(35.55,52.42) 37.53,52.42 37.53,50.74 38.09,50.18 43.58,50.18 43.58,27.63 46.72,24.49 46.72,14.13 U7.2 ; v1(33.11,52.42) 30.8,52.42 30.8,55.52 v1(27.28,55.52)
COL_DEC_2: length 53.1
  TOP w0.15: v1(40.5,46.34) 29.72,46.34 U13.1
  BOTTOM w0.15: v1(40.5,46.34) 43.27,46.34 43.27,27.36 44.14,26.5 44.14,13.48 U7.3
COL_DEC_3: length 54.2
  TOP w0.15: U13.9 v1(34.28,54.28)
  BOTTOM w0.15: v1(34.28,54.28) 36.64,54.28 40.14,50.78 43.88,50.78 43.88,27.93 47.02,24.79 47.02,12.83 U7.4
COL_DEC_4: length 47.1
  TOP w0.15: U14.1 v1(36.72,49.73)
  BOTTOM w0.15: v1(36.72,49.73) 37.06,49.4 37.83,49.4 37.83,46.69 38.24,46.27 39.77,46.27 39.77,44.22 40.46,43.52 42.98,43.52 42.98,26.25 43.84,26.25 43.84,12.17 U7.5
COL_DEC_5: length 51.8
  TOP w0.15: U14.9 v1(41.28,55.26)
  BOTTOM w0.15: v1(41.28,55.26) 41.28,52.21 42.29,51.2 46.26,51.2 46.26,26.34 47.32,25.27 47.32,11.52 U7.6
COL_DEC_6: length 52.5
  TOP w0.15: U15.1 v1(43.72,52.42)
  BOTTOM w0.15: U7.7 49.04,10.87 49.04,32.17 49.82,32.17 49.82,37.28 48.8,38.31 48.8,51.6 45.46,51.6 45.46,52.42 v1(43.72,52.42)
COL_DEC_7: length 52.2
  TOP w0.15: U15.9 v1(48.28,52.72)
  BOTTOM w0.15: U7.8 50.38,10.22 50.38,50.62 v1(48.28,52.72)
COL_DEC_8: length 29.1
  TOP w0.15: v1(34.9,10.1) 34.21,10.79 31.82,10.79 31.82,11.63 22.72,11.63 U26.1
  BOTTOM w0.15: v1(34.9,10.1) 37.76,7.23 43.84,7.23 43.84,9.57 U7.9
COL_DEC_9: length 49.6
  TOP w0.15: v1(52.42,22.75) 52.42,22.65 52.11,22.33 46.99,22.33 46.99,22.45 42.6,22.45 42.6,21.36 33.63,21.36 33.63,21.06 27.28,21.06 U26.9
  BOTTOM w0.15: U7.10 52.29,8.92 52.29,22.62 v1(52.42,22.75)
COL_DEC_10: length 26.1
  TOP w0.15: v1(29.7,14.42) 29.7,13.13 U27.1
  BOTTOM w0.15: v1(29.7,14.42) 29.7,6.93 44.26,6.93 44.26,8.27 U7.11
COL_DEC_11: length 25.2
  TOP w0.15: v1(38.42,17.58) 34.28,17.58 U27.9
  BOTTOM w0.15: v1(38.42,17.58) 39.21,18.36 42.75,18.36 42.75,11.72 43.54,11.72 43.54,7.62 U7.13
COL_DEC_12: length 14.2
  TOP w0.15: U28.1 36.72,11.18 v1(42.99,11.18)
  BOTTOM w0.15: v1(42.99,11.18) 42.99,8.27 U7.14
COL_DEC_13: length 13.4
  TOP w0.15: v1(42,17.82) 41.28,17.82 U28.9
  BOTTOM w0.15: v1(42,17.82) 42.45,17.37 42.45,8.92 U7.15
COL_DEC_14: length 7.4
  TOP w0.15: v1(41.91,12.08) 43.72,12.08 U29.1
  BOTTOM w0.15: v1(41.91,12.08) 41.91,9.57 U7.16
COL_DEC_15: length 17
  TOP w0.15: U29.9 48.28,16.49 v1(41.28,16.49)
  BOTTOM w0.15: v1(41.28,16.49) 41.28,10.22 U7.17
COL_DEC_EN_N: length 49
  TOP w0.15: v1(15.77,11.87) 15.75,11.85 11.36,11.85 v1(10.89,12.32)
  BOTTOM w0.15: v1(10.89,12.32) 10.89,10.45 U1.33 ; U7.18 34.36,10.87 34.36,8.8 30.25,8.8 30.25,16.23 18.69,16.23 18.23,15.76 18.23,14.35 16.08,14.35 15.77,14.04 v1(15.77,11.87)
COL_IN_SEL: length 177.7
  TOP w0.15: U13.12 32.33,55.36 32.52,55.36 v1(32.52,54.52) 31.67,54.52 ; U12.4 24.67,53.24 ; 24.67,53.24 24.67,53.87 25.33,54.52 ; 24.67,53.24 19.61,53.24 19.61,51.07 9.72,51.07 9.72,49.16 7.62,47.06 7.62,44.75 U6.12 ; U12.12 25.33,54.52 ; 25.33,54.52 31.67,54.52 ; U15.12 46.33,55.73 45.67,55.73 ; 31.67,54.52 U13.4 ; U26.12 v1(25.33,17.58) 24.67,16.93 U26.4 ; U27.12 32.33,17.75 v1(28.22,17.75) ; U14.4 38.67,53.16 v1(39.33,53.81) U14.12 39.33,57.92 42.12,57.92 42.12,55.73 45.67,55.73 ; 38.67,16.49 v1(34.58,16.49) 34.58,15.39 31.67,15.39 U27.4 ; 38.67,16.49 U28.4 ; 38.67,16.49 39.33,16.49 ; 45.67,55.73 45.67,54.84 45.46,54.62 45.46,54.18 45.67,53.96 U15.4 45.67,49.21 v1(51.46,49.21) ; v1(51.46,20.22) 46.33,20.22 U29.12 46.33,17.82 43.09,17.82 43.09,19.92 39.33,19.92 U28.12 39.33,16.49 ; 39.33,16.49 39.87,15.95 45.58,15.95 45.58,14.18 45.67,14.18 U29.4
  BOTTOM w0.15: v1(39.33,53.81) 38.07,55.06 33.07,55.06 v1(32.52,54.52) ; v1(25.33,17.58) 28.06,17.58 v1(28.22,17.75) 33.32,17.75 v1(34.58,16.49) ; v1(51.46,20.22) v1(51.46,49.21)
COL_IN_UNSEL: length 215.2
  TOP w0.15: U13.10 33.63,53.44 34.91,53.44 ; U14.10 40.63,54.65 v1(44.37,54.65) U15.2 ; 30.37,15.95 27.67,15.95 ; 30.37,15.95 U27.2 ; 30.37,15.95 v1(33.63,15.95) U27.10 ; 27.67,15.95 27.67,12.08 23.37,12.08 U26.2 ; 27.67,15.95 26.63,15.95 U26.10 ; U29.2 44.37,11.72 ; 44.37,11.72 44.66,11.44 50.92,11.44 v1(50.92,16.21) 50.92,19.92 47.63,19.92 U29.10 47.63,17.22 40.63,17.22 U28.10 ; 44.37,11.72 42.45,11.72 42.45,11.54 37.37,11.54 U28.2 37.37,15.63 v1(35.12,15.63) ; U15.10 v1(47.63,54.65) ; v1(24.13,52.65) 23.37,52.65 U12.2 ; v1(25.22,52.65) 30.37,52.65 U13.2 ; 34.91,53.44 35.08,53.27 37.37,53.27 U14.2 ; 34.91,53.44 v1(34.91,56.53) ; U12.10 26.63,54.98 29.05,54.98 v1(29.05,56.53)
  BOTTOM w0.15: 24.13,56.53 v1(24.13,52.65) v1(25.22,52.65) ; 24.13,56.53 21.83,58.83 1.17,58.83 1.17,51.09 3.41,51.09 U6.10 ; 24.13,56.53 v1(29.05,56.53) v1(34.91,56.53) 42.49,56.53 v1(44.37,54.65) 45.48,54.65 45.78,54.94 46.22,54.94 46.52,54.65 v1(47.63,54.65) 50.92,51.35 v1(50.92,16.21) ; v1(35.12,15.63) 34.8,15.95 v1(33.63,15.95)
COL_SW_VDD: length 187.2
  TOP w0.15: 45.02,57.92 44.2,58.74 39.5,58.74 38.67,57.92 ; 45.02,57.92 45.67,57.92 ; 45.02,57.92 U15.14 ; U13.14 31.02,57.92 ; 31.02,57.92 24.67,57.92 ; 31.02,57.92 31.67,57.92 ; U13.13 31.67,57.92 ; 31.67,57.92 38.02,57.92 ; U27.14 31.02,19.92 31.67,19.92 ; 38.02,57.92 38.67,57.92 ; 38.02,57.92 U14.14 ; U14.13 38.67,57.92 ; 24.67,57.92 24.02,57.92 U12.14 24.02,53.95 v1(21.4,53.95) 6.23,53.95 6.23,48.85 U6.11 ; 24.67,57.92 U12.13 ; 24.02,19.92 24.02,20.05 v1(23.56,20.51) ; 24.02,19.92 U26.14 ; 24.02,19.92 24.67,19.92 U26.13 ; U15.13 45.67,57.92 ; 45.67,57.92 50.11,57.92 50.11,50.05 58.52,50.05 58.52,20.76 46.22,20.76 45.67,20.22 ; 45.02,20.22 38.7,20.22 ; 45.02,20.22 U29.14 ; 45.02,20.22 45.67,20.22 ; 38.7,20.22 38.7,19.92 38.67,19.92 ; 38.7,20.22 38.7,21.01 35.73,21.01 35.73,20.76 32.52,20.76 31.67,19.92 ; U28.14 38.02,19.92 38.67,19.92 ; U28.13 38.67,19.92 ; 31.67,19.92 U27.13 ; 45.67,20.22 U29.13
  BOTTOM w0.15: v1(21.4,53.95) 21.4,49.13 26.8,43.73 26.8,22.12 25.18,20.51 v1(23.56,20.51)
HEADER_OUT1: length 70.1
  BOTTOM w0.15: U1.28 7.58,7.95 7.58,0.84 55.59,0.84 55.59,13.25 U30.2
HEADER_OUT2: length 52.1
  TOP w0.15: U30.3 52.51,9.55 34.5,9.55 34.36,9.69 34.36,9.84 34.01,10.19 31.88,10.19 31.52,10.54 31.52,10.98 31.18,11.33 18.99,11.33 18.82,11.16 18.38,11.16 18.21,11.33 12.14,11.33 12.02,11.44 11.58,11.44 11.3,11.17 10.72,11.17 v1(10.35,11.54)
  BOTTOM w0.15: U1.36 7.88,11.95 7.88,10.78 9.6,10.78 v1(10.35,11.54)
HEADER_OUT3: length 52.7
  TOP w0.15: U30.4 40.43,9.13 39.67,8.38 27.83,8.38 27.83,9.09 9.81,9.09 v1(9.81,12.62)
  BOTTOM w0.15: U1.44 9.85,15.03 9.81,15.03 v1(9.81,12.62)
HEADER_OUT4: length 56.7
  TOP w0.15: v1(22.53,8.54) 22.29,8.79 9.25,8.79 v1(9.25,12.05) ; U30.5 53.15,6.59 53.15,5.98 v1(22.86,5.98)
  BOTTOM w0.15: v1(9.25,12.05) 9.28,12.08 10.35,12.08 U1.45 ; v1(22.53,8.54) 22.53,6.3 v1(22.86,5.98)
HEADER_OUT5: length 55.5
  TOP w0.15: v1(18.15,4.95) 18.21,4.89 26.29,4.89 26.29,5.19 53.49,5.19 U30.6
  BOTTOM w0.15: U1.46 10.85,13.16 12.37,13.16 12.37,4.95 v1(18.15,4.95)
HEADER_OUT6: length 64.2
  TOP w0.15: v1(11.35,17.43) 18.92,17.43 v1(20.67,15.69) ; v1(51.71,7.63) 51.95,7.87 v1(56.76,7.87)
  BOTTOM w0.15: U30.8 56.21,13.25 56.21,8.42 v1(56.76,7.87) ; v1(20.67,15.69) 28.73,15.69 28.73,6.63 50.71,6.63 v1(51.71,7.63) ; U1.47 v1(11.35,17.43)
HEADER_OUT7: length 84.6
  TOP w0.15: v1(58.43,0.84) 7.47,0.84 7.47,6.08 12.08,6.08 v1(12.99,6.99)
  BOTTOM w0.15: U1.48 11.85,14.91 11.29,14.91 11.29,13.76 12.99,13.76 v1(12.99,6.99) ; U30.9 58.43,10.41 v1(58.43,0.84)
HEADER_OUT8: length 55.4
  TOP w0.15: U30.10 55.89,9.13 55.89,8.17 43.77,8.17 42.41,6.82 22.02,6.82 22.02,6.64 13.98,6.64 v1(13.55,6.21)
  BOTTOM w0.15: U1.51 13.35,11.2 13.55,11.2 v1(13.55,6.21)
HEADER_OUT9: length 54.5
  TOP w0.15: U30.11 56.21,7.55 52.55,7.55 52.55,6.52 22.32,6.52 22.32,6.3 15.22,6.3 v1(15.02,6.09)
  BOTTOM w0.15: U1.52 13.85,6.75 14.36,6.75 v1(15.02,6.09)
HEADER_OUT10: length 38
  TOP w0.15: v1(23.94,5.43) 24,5.49 55.73,5.49 U30.12
  BOTTOM w0.15: U1.78 20.68,5.45 20.68,5.43 v1(23.94,5.43)
MEAS_EXT: length 4.1
  BOTTOM w0.15: U9.10 5.83,41.25 5.83,40.6 J3.1
ROW_0: length 15.7
  TOP w0.15: U16.3 v1(16.68,46.98)
  BOTTOM w0.15: U31.2 21.22,40.05 21.22,42.14 20.11,42.14 20.11,43.55 v1(16.68,46.98)
ROW_1: length 14
  TOP w0.15: U16.11 v1(22.36,45.02)
  BOTTOM w0.15: U31.3 23.41,37.23 23.41,42.38 22.36,43.43 v1(22.36,45.02)
ROW_2: length 18.8
  TOP w0.15: v1(20.14,40.51) 20.14,41.84 16.69,41.84 16.69,39.98 U19.3
  BOTTOM w0.15: v1(20.14,40.51) 20.14,36.05 U31.4
ROW_3: length 9.5
  TOP w0.15: U19.11 v1(19.26,38.02)
  BOTTOM w0.15: U31.5 19.26,34.39 v1(19.26,38.02)
ROW_4: length 16.7
  TOP w0.15: U22.3 14.73,32.98 14.73,33.37 15.08,33.37 16.99,35.28 23.71,35.28 23.71,37.52 U31.8
ROW_5: length 12.3
  TOP w0.15: U22.11 21.19,31.02 21.19,34.69 25,34.69 U31.9
ROW_6: length 19.8
  TOP w0.15: U24.3 15.85,25.98 15.85,27.67 23.71,27.67 23.71,32.45 U31.10
ROW_7: length 13.6
  TOP w0.15: U31.11 24.02,30.2 24.02,24.02 U24.11
ROW_8: length 14.1
  TOP w0.15: U17.3 v1(45.71,46.98)
  BOTTOM w0.15: v1(45.71,46.98) 45.95,46.73 45.95,39.77 U31.35
ROW_9: length 23.7
  TOP w0.15: U31.34 44.05,37.23 44.05,41.93 44.72,42.6 57.92,42.6 57.92,45.02 U17.11
ROW_10: length 11.5
  TOP w0.15: U21.3 46.55,39.98 46.55,35.28 U31.33
ROW_11: length 17.1
  TOP w0.15: U31.32 46.27,32.46 46.27,34.28 46.97,34.98 47.85,34.98 48.68,35.81 52.48,35.81 52.48,38.02 U21.11
ROW_12: length 8.5
  TOP w0.15: v1(49.28,33.07) 49.37,32.98 U23.3
  BOTTOM w0.15: U31.29 49.28,37.07 49.28,35.49 49.44,35.32 49.44,34.88 49.28,34.71 v1(49.28,33.07)
ROW_13: length 12.1
  TOP w0.15: U23.11 v1(54.86,31.02) ; v1(48.9,35.1) 51.76,35.1 v1(52.69,34.17)
  BOTTOM w0.15: v1(52.69,34.17) 54.86,32 v1(54.86,31.02) ; U31.28 48.34,35.47 48.53,35.47 v1(48.9,35.1)
ROW_14: length 12.7
  TOP w0.15: v1(47.68,26.07) 50.08,26.07 50.08,25.98 U25.3
  BOTTOM w0.15: U31.27 46.59,32.77 46.59,27.32 47.68,27.32 v1(47.68,26.07)
ROW_15: length 17.1
  TOP w0.15: U31.26 50.18,28.55 57.92,28.55 57.92,24.02 U25.11
ROW_ADD_0: length 36.7
  BOTTOM w0.15: U18.23 2.96,25.73 2.96,25.64 1.74,24.42 1.74,3.58 5.53,3.58 5.53,4.45 U1.21
ROW_ADD_1: length 29.3
  BOTTOM w0.15: U18.22 4.33,25.08 4.33,4.95 U1.22
ROW_ADD_2: length 27.6
  BOTTOM w0.15: U1.23 4.62,5.45 4.62,24.43 U18.21
ROW_ADD_3: length 25.8
  BOTTOM w0.15: U18.20 4.92,23.77 4.92,5.95 U1.24
ROW_DEC_0: length 27
  TOP w0.15: U16.1 v1(15.31,48.28)
  BOTTOM w0.15: v1(15.31,48.28) 15.31,45.36 16.74,45.36 16.74,35.91 17.46,35.18 17.46,26.38 U18.1
ROW_DEC_1: length 20.4
  TOP w0.15: U16.9 19.02,43.72 v1(19.02,42.85)
  BOTTOM w0.15: U18.2 18.22,25.73 18.22,42.05 v1(19.02,42.85)
ROW_DEC_2: length 21.2
  TOP w0.15: U19.1 15.69,41.28 v1(16.15,40.82)
  BOTTOM w0.15: v1(16.15,40.82) 16.36,40.6 16.36,31.75 16.12,31.75 16.12,25.08 U18.3
ROW_DEC_3: length 15.8
  TOP w0.15: U19.9 16.92,36.72 v1(15.82,36.72)
  BOTTOM w0.15: v1(15.82,36.72) 15.82,24.43 U18.4
ROW_DEC_4: length 15.4
  TOP w0.15: v1(14.98,34.19) 13.28,34.19 13.28,34.28 U22.1
  BOTTOM w0.15: v1(14.98,34.19) 14.98,23.77 U18.5
ROW_DEC_5: length 9.6
  TOP w0.15: U22.9 v1(19.26,29.72)
  BOTTOM w0.15: v1(19.26,29.72) 18.52,28.98 18.52,23.12 U18.6
ROW_DEC_6: length 12.3
  TOP w0.15: U24.1 v1(10.94,27.28)
  BOTTOM w0.15: v1(10.94,27.28) 14.55,27.28 14.55,22.47 U18.7
ROW_DEC_7: length 4.4
  TOP w0.15: U24.9 v1(19.56,22.72)
  BOTTOM w0.15: v1(19.56,22.72) 18.66,21.82 U18.8
ROW_DEC_8: length 58.8
  TOP w0.15: v1(23.71,43.95) 43.2,43.95 43.2,48.19 50.08,48.19 50.08,48.28 U17.1
  BOTTOM w0.15: U18.9 19.8,21.17 19.8,21.32 23.71,25.23 v1(23.71,43.95)
ROW_DEC_9: length 60.7
  TOP w0.15: U17.9 53.98,43.72 53.98,42.98 26.55,42.98 26.55,28.8 v1(24.86,27.1)
  BOTTOM w0.15: U18.10 22.85,20.52 22.85,21.01 24.86,23.03 v1(24.86,27.1)
ROW_DEC_10: length 53.6
  TOP w0.15: U21.1 49.4,41.28 49.4,40.28 46.26,40.28 46.26,35.7 45.55,35 44.07,35 43.58,34.5 43.58,29.52 v1(42.27,28.21)
  BOTTOM w0.15: v1(42.27,28.21) 42.27,26.74 41.78,26.25 27.5,26.25 27.5,19.87 U18.11
ROW_DEC_11: length 72.7
  TOP w0.15: v1(56.21,35.51) 55.82,35.9 55.82,36.72 U21.9 ; v1(56.21,21.91) v1(43.15,21.91)
  BOTTOM w0.15: v1(56.21,35.51) v1(56.21,21.91) ; U18.13 13.35,19.22 13.35,18.91 13.67,18.59 29.91,18.59 29.91,25.95 43.15,25.95 v1(43.15,21.91)
ROW_DEC_12: length 53.2
  TOP w0.15: U23.1 48.83,34.28 v1(48.74,34.19) ; v1(48.49,23.41) 27.14,23.41 27.14,21.72 14.14,21.72 13.01,20.59 v1(13.01,19.87)
  BOTTOM w0.15: v1(48.49,23.41) 48.74,23.66 v1(48.74,34.19) ; U18.14 v1(13.01,19.87)
ROW_DEC_13: length 83.2
  TOP w0.15: v1(10.14,20.52) 12.68,17.98 21.21,17.98 21.51,17.68 21.51,14.86 21.54,14.82 21.54,14.38 21.51,14.34 v1(21.51,13.49) ; U23.9 v1(53.98,29.72)
  BOTTOM w0.15: v1(21.51,13.49) 27.83,13.49 27.83,6.33 52.61,6.33 52.61,21.3 53.98,22.67 v1(53.98,29.72) ; U18.15 v1(10.14,20.52)
ROW_DEC_14: length 45
  TOP w0.15: v1(12.76,21.17) 13.61,22.02 24.61,22.02 24.61,26.25 39.99,26.25 40.5,26.77 40.5,27.28 U25.1
  BOTTOM w0.15: U18.16 v1(12.76,21.17)
ROW_DEC_15: length 55.9
  TOP w0.15: U25.9 57.92,22.72 57.92,21.36 v1(45.16,21.36) ; v1(24.12,21.06) v1(14.25,21.06) ; v1(45.16,25.04) 45.16,23.71 v1(25.76,23.71)
  BOTTOM w0.15: v1(14.25,21.06) 13.49,21.82 U18.17 ; v1(25.76,23.71) 25.76,22.7 v1(24.12,21.06) ; v1(45.16,21.36) v1(45.16,25.04)
ROW_DEC_EN_N: length 23.4
  BOTTOM w0.15: U18.18 5.22,22.47 5.22,6.45 U1.25
ROW_IN_SEL: length 166.2
  TOP w0.15: v1(21.4,24.67) U24.12 15.15,24.67 15.15,25.33 U24.4 ; v1(20.68,38.67) U19.12 15.69,38.67 v1(15.06,39.3) 15.04,39.33 U19.4 ; 57.92,38.67 58.22,38.97 58.22,45.67 U17.12 53.98,45.67 53.98,46.33 U17.4 46.87,46.33 43.95,43.41 25.95,43.41 ; 57.92,38.67 U21.12 53.43,38.67 53.43,39.33 U21.4 ; 57.92,38.67 57.92,31.67 ; U22.12 v1(20.35,31.67) 20.35,34.67 ; 57.92,31.67 57.92,29.17 v1(55.31,29.17) 53.43,29.17 53.43,32.33 U23.4 ; 57.92,31.67 U23.12 ; U22.4 14.61,32.33 16.95,34.67 20.35,34.67 ; 25.95,43.41 25.95,37.54 24.45,37.54 24.02,37.11 24.02,34.98 20.67,34.98 20.35,34.67 ; 25.95,43.41 22.91,43.41 22.91,45.67 U16.12 15.13,45.67 15.13,46.33 U16.4 ; U25.4 54.66,25.33 v1(55.31,24.67) U25.12
  BOTTOM w0.15: v1(21.4,24.67) 21.4,30.23 ; 21.4,30.23 23.41,30.23 23.41,35.18 21.66,35.18 20.68,36.16 v1(20.68,38.67) ; 21.4,30.23 20.88,30.23 20.35,30.76 v1(20.35,31.67) ; U9.6 15.06,40.6 v1(15.06,39.3) ; v1(55.31,24.67) v1(55.31,29.17)
ROW_IN_SEL_CTRL0: length 42.1
  TOP w0.15: v1(13.04,29.05) 11.12,29.05 10.92,29.24 10.48,29.24 10.28,29.05 9.23,29.05 8.9,28.72 v1(8.9,14.67)
  BOTTOM w0.15: U9.1 14.43,43.86 14.74,44.16 15.04,44.16 15.35,43.86 15.46,43.86 15.61,43.71 15.61,42.56 15.84,42.32 15.84,41.88 15.61,41.64 15.61,37.63 15.46,37.48 13.19,37.48 13.04,37.33 v1(13.04,29.05) ; U1.38 7.58,12.95 7.58,14.67 v1(8.9,14.67)
ROW_IN_SEL_CTRL1: length 43.5
  TOP w0.15: v1(6.57,15.35) 4.69,17.24 v1(4.69,26.72)
  BOTTOM w0.15: U9.14 6.98,43.86 6.98,43.77 0.77,43.77 0.77,26.72 v1(4.69,26.72) ; v1(6.57,15.35) 7.28,14.65 7.28,13.45 U1.39
ROW_IN_UNSEL: length 192.6
  TOP w0.15: U21.10 v1(55.03,37.37) 55.03,34.65 54.01,33.63 ; v1(53.4,26.63) U25.2 42.05,26.63 42.05,25.95 25.64,25.95 v1(25.4,25.71) ; U21.2 v1(55.03,40.63) ; 10.99,38.44 10.99,40.63 U19.2 ; 10.99,38.44 4.42,38.44 4.42,39.52 7.15,39.52 9.59,41.97 13.88,41.97 13.88,44.37 v1(16.15,44.37) U16.10 ; 10.99,38.44 10.99,36.33 v1(14.06,36.33) 15.1,37.37 U19.10 ; U23.2 54.01,33.63 ; 54.01,33.63 54.01,30.37 U23.10 ; v1(20.85,28.94) 19.41,30.37 U22.10 ; U25.10 v1(53.4,23.37) ; v1(13.28,27.97) 13.28,26.63 U24.2 11.18,26.63 11.18,22.03 12.85,22.03 13.58,22.76 13.58,23.37 U24.10 v1(20.85,23.37) v1(24.02,23.37) ; v1(4.44,27.97) 4.68,28.21 4.68,34.58 U8.3 ; U16.2 v1(14.63,47.63) ; U22.2 v1(13.89,33.63) ; U17.10 v1(55.03,44.37) ; U17.2 v1(55.03,47.63)
  BOTTOM w0.15: v1(4.44,27.97) 10.47,27.97 10.48,27.96 10.92,27.96 10.93,27.97 v1(13.28,27.97) 13.89,28.58 v1(13.89,33.63) 13.98,33.71 13.98,36.26 v1(14.06,36.33) ; v1(24.02,23.37) 24.02,27.64 25.4,27.64 v1(25.4,25.71) ; v1(14.63,47.63) 14.63,45.13 15.39,44.37 v1(16.15,44.37) ; v1(55.03,47.63) v1(55.03,44.37) v1(55.03,40.63) v1(55.03,37.37) 52.05,34.39 52.05,27.97 v1(53.4,26.63) v1(53.4,23.37) ; v1(20.85,28.94) v1(20.85,23.37)
ROW_IN_UNSEL_CTRL: length 25.2
  TOP w0.15: U8.1 4.98,35.88 4.98,27.26 4.14,27.26 4.14,16.56 v1(6.14,14.57)
  BOTTOM w0.15: v1(6.14,14.57) 6.14,13.95 U1.40
VREFM: length 64.7
  TOP w0.15: U30.7 59.04,16.75 59.04,2.79 48.85,2.79 47.89,3.76 31.53,3.76 v1(31.53,1.96)
  BOTTOM w0.15: U1.10 13.35,1.62 31.2,1.62 v1(31.53,1.96)
VREFP: length 62.1
  TOP w0.15: 16.1,1.57 12.8,1.57 C12.1 12.8,3.62 v1(11.71,3.62) ; 16.1,1.57 C11.1 ; 16.1,1.57 16.92,1.57 18.02,2.67 18.02,4.11 v1(28.72,4.11)
  BOTTOM w0.15: U30.1 52.91,15.03 52.91,4.79 52.22,4.11 v1(28.72,4.11) ; U1.9 13.85,3.62 v1(11.71,3.62)
N13187266: length 23.6
  TOP w0.15: v1(18.77,51.73) 14.2,51.73 ; 14.2,51.73 14.2,52.7 R7.1 ; 14.2,51.73 9.72,51.73 ; 9.72,51.73 7.97,51.73 7.97,49.9 R9.1 ; 9.72,51.73 9.72,52.8 R8.1
  BOTTOM w0.15: U4.12 18.77,55.99 v1(18.77,51.73)
N13196250: length 9.5
  TOP w0.15: CR3.1 58.4,55.22 56.97,55.22 56.97,55.92 ; 56.97,55.92 v1(55.93,55.92) ; 56.97,55.92 U5.5
  BOTTOM w0.15: v1(55.93,55.92) 55.93,59.08 54.77,59.08 L1.2
N13196262: length 18.7
  TOP w0.15: U5.2 51.34,57.23 51.34,53.8 R11.1 52.1,52.89 58.24,52.89 58.24,51.1 R10.2
N13196294: length 2.2
  TOP w0.15: v1(51.77,58.2) 52.09,57.88 U5.1
  BOTTOM w0.15: R12.2 v1(51.77,58.2)
N13196302: length 2.7
  BOTTOM w0.15: C9.2 R12.1
N13196326: length 20.4
  TOP w0.15: U5.8 v1(59.16,57.88)
  BOTTOM w0.15: C8.2 51.28,55.8 51.28,51.95 59.16,51.95 v1(59.16,57.88)
N13248787: length 20.4
  TOP w0.15: U2.6 3.42,8.46 v1(3.42,6.84) U2.10 0.82,6.84 ; U2.8 0.82,8.91 0.82,6.84 ; 0.82,6.84 0.82,5.16 ; 0.82,5.16 0.82,3.09 U2.9 4.3,3.09 U2.7 ; 0.82,5.16 U2.11
  BOTTOM w0.15: v1(3.42,6.84) 2.88,6.29 2.88,4.3 R5.1
N13249241: length 19.1
  TOP w0.15: U2.3 6.61,6 7.08,6.46 7.08,6.92 8,7.85 14.35,7.85 v1(14.39,7.81) ; v1(14.39,13.79) 13.82,13.22 13.82,12.7 R2.1
  BOTTOM w0.15: v1(14.39,13.79) v1(14.39,7.81)
N13249245: length 14.7
  TOP w0.15: R1.1 10.61,14.9 8.24,12.53 6.92,12.53 6.47,12.09 6.47,6.65 U2.2
N13261184: length 11.3
  TOP w0.15: R3.1 v1(16.31,10.3) C4.2 ; R2.2 v1(16.43,12.7) R4.1
  BOTTOM w0.15: v1(16.31,10.3) 16.43,10.42 v1(16.43,12.7) 17.18,13.45 U1.62
N13262575: length 7.4
  TOP w0.15: v1(18.37,12.73) 18.37,14.9 C3.2 R1.2
  BOTTOM w0.15: U1.64 18.93,12.45 18.93,12.73 v1(18.37,12.73)
N13281571: length 24.4
  TOP w0.15: v1(22.33,3.38) 22.87,2.84 22.87,2.6 ; 22.87,2.6 22.87,1.58 28.5,1.58 CR1.1 ; 22.87,2.6 C1.1
  BOTTOM w0.15: U1.66 20.98,11.45 20.98,11.63 24.99,11.63 24.99,4.84 23.79,4.84 v1(22.33,3.38)
N13289262: length 32.3
  TOP w0.15: 37.47,1.55 37.17,1.24 20.75,1.24 v1(20.75,3.39) ; 37.47,1.55 41.53,1.55 41.53,1.98 41.95,2.4 R6.1 ; 37.47,1.55 37.47,2.4 C7.1
  BOTTOM w0.15: v1(20.75,3.39) 18.93,3.39 18.93,6.45 U1.76
N13290467: length 3.4
  TOP w0.15: v1(8.31,3.62) 9.4,3.62 C5.1
  BOTTOM w0.15: v1(8.31,3.62) 8.35,3.58 U1.20
N13297750: length 3.7
  TOP w0.15: Y1.3 28.18,7.5 28.18,7.75 26.34,7.75 U3.1
N13297765: length 3.6
  TOP w0.15: U3.2 28.18,10.37 28.18,10.5 Y1.1
N13310346: length 6.1
  TOP w0.15: C10.1 v1(18.17,7.5)
  BOTTOM w0.15: U1.67 18.17,10.95 v1(18.17,7.5)
N131865130: length 22.7
  TOP w0.15: R7.2 v1(17.96,52.7)
  BOTTOM w0.15: v1(17.96,52.7) 16.53,54.14 16.53,58.53 3.21,58.53 U6.1
N131865131: length 9.9
  TOP w0.15: v1(10.02,53.35) 10.02,53.12 10.34,52.8 R8.2
  BOTTOM w0.15: v1(10.02,53.35) 3.69,53.35 U6.2
N131865132: length 15.5
  TOP w0.15: v1(8.17,46.82) 8.17,47.11 10.02,48.97 10.02,49.9 R9.2
  BOTTOM w0.15: v1(8.17,46.82) 8.17,50.81 7.6,51.39 3.11,51.39 U6.3
N132488690: length 7.6
  TOP w0.15: J2.2 5.88,9.15 5.88,7.3 U2.1
N132492920: length 2.5
  TOP w0.15: J2.1 1.7,15.87 CR2.1
N132698311: length 5.1
  TOP w0.15: CR1.3 v1(29.44,2.5)
  BOTTOM w0.15: v1(29.44,2.5) 32.43,2.5 J1.1
N1324771962: length 2.7
  TOP w0.15: R4.2 v1(20.92,12.7)
  BOTTOM w0.15: v1(20.92,12.7) 20.85,12.7 20.6,12.95 U1.63
N1324771968: length 9.7
  BOTTOM w0.15: U3.3 24.69,8.79 24.69,10.98 24.34,11.33 22.11,11.33 21.94,11.16 21.94,10.28 21.62,9.95 U1.69
N1324771969: length 4.8
  BOTTOM w0.15: U3.4 22.36,10.37 22.36,9.45 U1.70

## Copper pours and planes (outline as drawn; the poured copper is in the pictures)
GND on GROUND: 0.5,0.5 0.5,59.5 59.5,59.5 59.5,0.5
VCC3_3V on POWER: 31,0.5 31,59.5 59.5,59.5 59.5,0.5
VCC5V on POWER: 0.5,0.5 0.5,59.5 29,59.5 29,0.5

## Text on the board
NCLEGEND-1-4: FIGURE | FINISHED_SIZE | 0.3429 | 1.02 | 1.0287 | 15.0 | DRILL CHART: TOP to BOTTOM | ALL UNITS ARE IN MILLIMETERS | TOLERANCE_DRILL | +0.0/-0.0 | +0.1/-0.1 | +0.102/-0.102 | PLATED | NON-PLATED | QTY | 294 | 48 | 46 | 1
